# EAGLE board EASYDuino1-1-Rev1 (EAGLE 5.10)
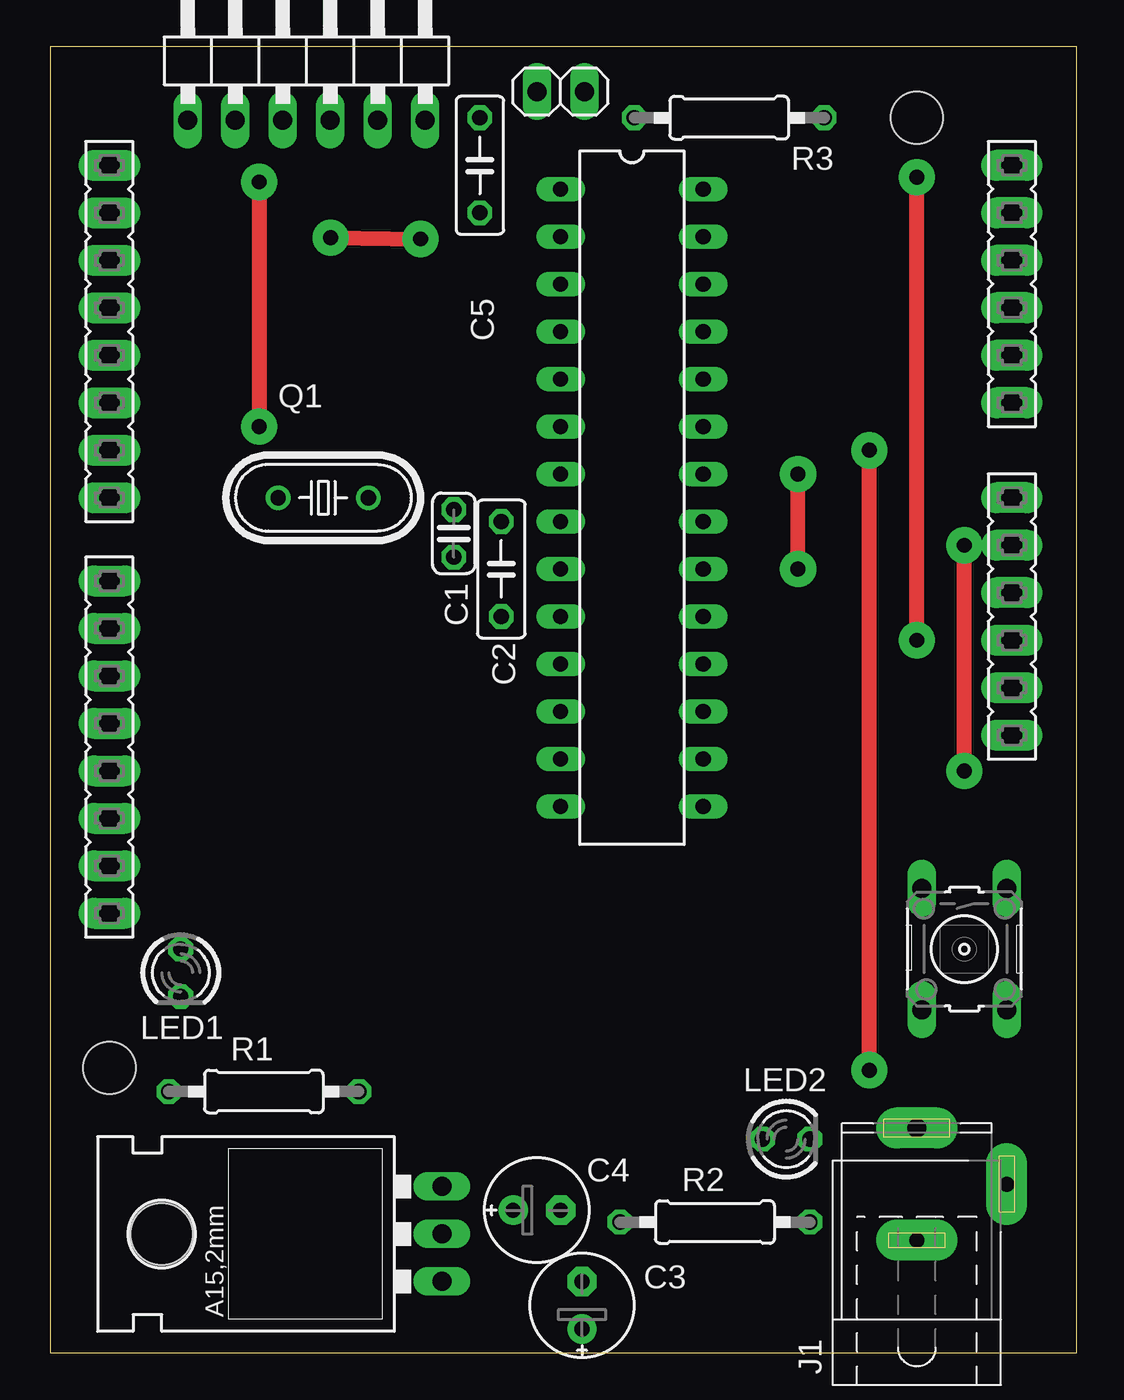
[diagram p0: board, top side]
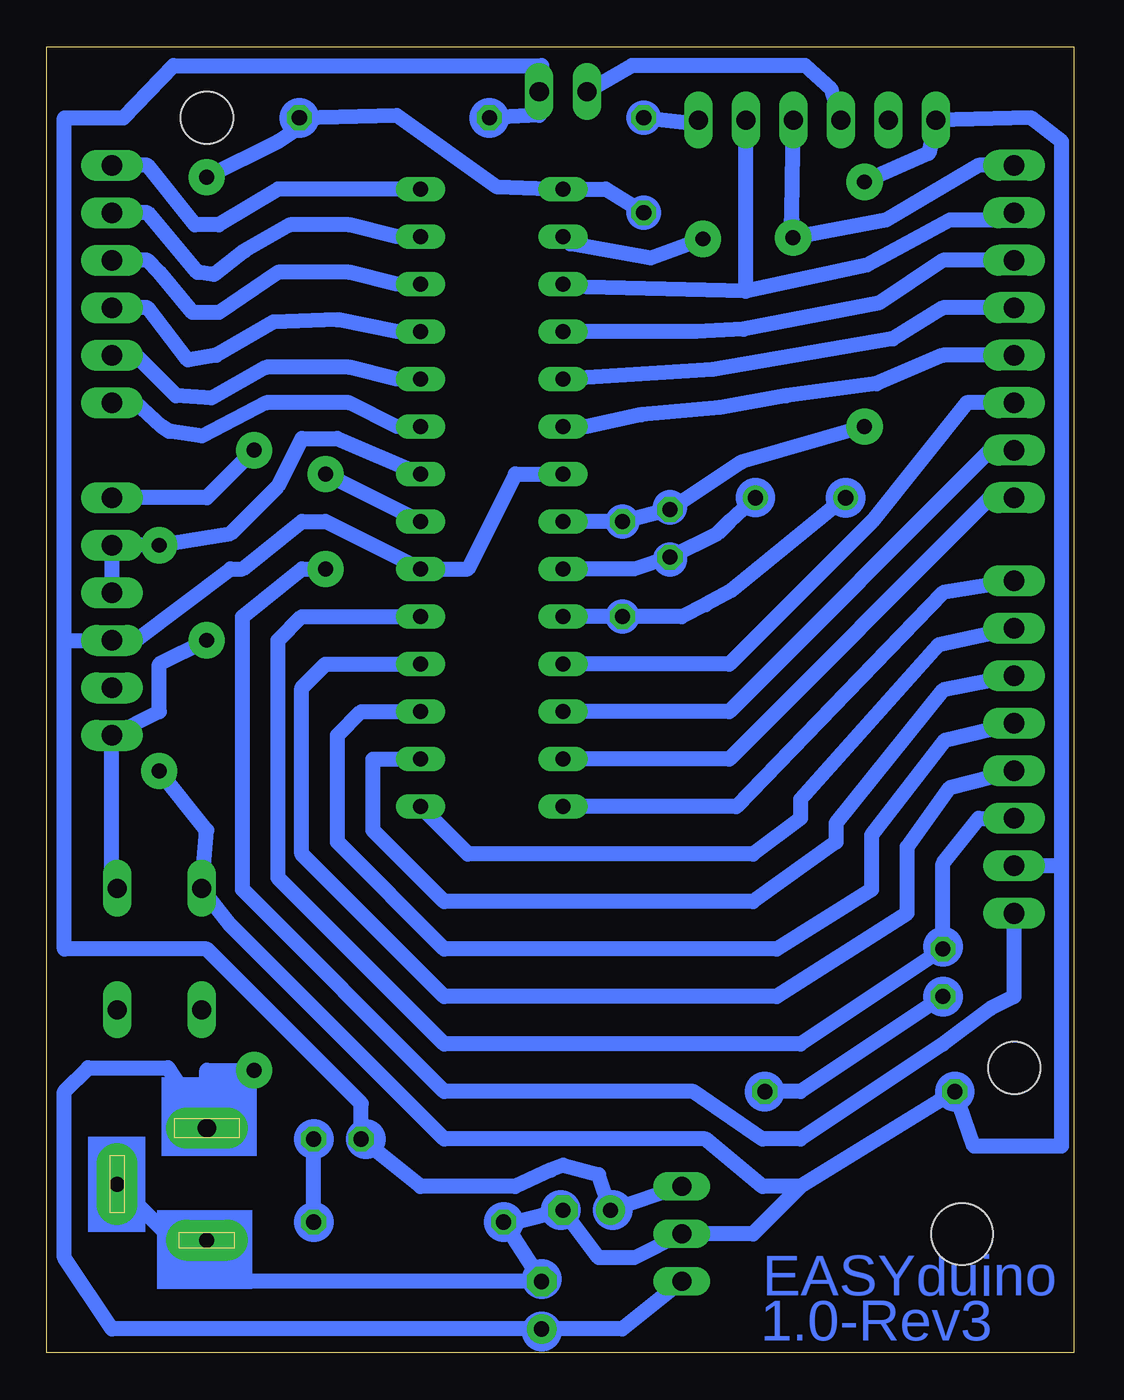
[diagram p1: board, bottom side, seen from below]

Size 54.91 x 69.84 mm. Coordinates in mm from the lower left corner, seen from the top.
Outline: 0,0 54.91,0 54.91,69.84 0,69.84 0,0
Copper layers (1*16): Top 0.035mm / dielectric 1.5mm / Bottom 0.035mm
Design rules "default": minimum track width 10mil, minimum drill 24mil, track to track 8mil, track to pad 8mil, pad to pad 8mil, via to via 8mil, smd to smd 8mil, copper to edge 40mil, drill to drill 8mil, minimum pad ring 10mil, minimum via ring 8mil, stop-mask expansion 4mil, vias tented up to drill 0mil, thermal gap 10mil
Holes 2.8 mm at 46.35,66.04 3.17,15.24

## Footprints (pad centres in the part's own frame; a part is rotated, then mirrored left to right if it is on the bottom)
C025-024X044 = drill 0.813 octagon: 1 -1.27,0; 2 1.27,0
C050-025X075 = drill 0.813 octagon: 1 -2.54,0; 2 2.54,0
E2,5-6E = drill 0.813 pad 1.575 round: + -1.27,0 | drill 0.813 pad 1.575 octagon: - 1.27,0
DIL28-3 = drill 0.813 long: 1 -16.51,-3.81; 2 -13.97,-3.81; 3 -11.43,-3.81; 4 -8.89,-3.81; 5 -6.35,-3.81; 6 -3.81,-3.81; 7 -1.27,-3.81; 8 1.27,-3.81; 9 3.81,-3.81; 10 6.35,-3.81; 11 8.89,-3.81; 12 11.43,-3.81; 13 13.97,-3.81; 14 16.51,-3.81; 15 16.51,3.81; 16 13.97,3.81; 17 11.43,3.81; 18 8.89,3.81; 19 6.35,3.81; 20 3.81,3.81; 21 1.27,3.81; 22 -1.27,3.81; 23 -3.81,3.81; 24 -6.35,3.81; 25 -8.89,3.81; 26 -11.43,3.81; 27 -13.97,3.81; 28 -16.51,3.81
78XXL = drill 1.016 long: GND 0,-3.81; IN -2.54,-3.81; OUT 2.54,-3.81 | hole 3.302: 0,11.176
SPC4077 = drill 0.8 pad 2.184 long: 1 -3,0; 2 0,-4.8 | drill 1 pad 2.184 long: 3 3,0
1X06/90 = drill 1.016 long: 1 -6.35,-3.81; 2 -3.81,-3.81; 3 -1.27,-3.81; 4 1.27,-3.81; 5 3.81,-3.81; 6 6.35,-3.81
1X02 = drill 1.016 long: 1 -1.27,0; 2 1.27,0
LED3MM = drill 0.813 octagon: A -1.27,0; K 1.27,0
HC49U-V = drill 0.813 round: 1 -2.413,0; 2 2.413,0
0207/10 = drill 0.813 octagon: 1 -5.08,0; 2 5.08,0
B3F-10XX = drill 1.016 long: 1 -3.251,2.261; 2 3.251,2.261; 3 -3.251,-2.261; 4 3.251,-2.261
FE08 = drill 1.1 long: 1 -8.89,0; 2 -6.35,0; 3 -3.81,0; 4 -1.27,0; 5 1.27,0; 6 3.81,0; 7 6.35,0; 8 8.89,0
FE06-MARCO = drill 1.1 long: 1 -6.35,0; 2 -3.81,0; 3 -1.27,0; 4 1.27,0; 5 3.81,0; 6 6.35,0

## Placement (x,y rotation side)
C1  22p  [C025-024X044]  21.59,43.81 270 top
C2  22p  [C050-025X075]  24.13,41.91 270 top
C3  100uF  [E2,5-6E]  28.45,2.54 90 top
C4  100uF  [E2,5-6E]  26.04,7.62 0 top
C5  10nF  [C050-025X075]  22.99,63.5 270 top
IC1  ATMEGA168/328  [DIL28-3]  31.11,45.72 270 top
IC2  7805  [78XXL]  17.14,6.35 90 top
J1  [SPC4077]  46.35,9.02 90 top
JP1  FTDI-cable  [1X06/90]  13.72,69.72 0 top
JP2  FTDI Vcc  [1X02]  27.3,67.44 180 top
LED1  [LED3MM]  6.99,20.32 270 top
LED2  [LED3MM]  39.37,11.43 0 top
Q1  16Mhz  [HC49U-V]  14.61,45.72 0 top
R1  560  [0207/10]  11.43,13.97 180 top
R2  560  [0207/10]  35.56,6.99 180 top
R3  10K  [0207/10]  36.32,66.04 180 top
S2  RESET  [B3F-10XX]  48.9,21.59 270 top
SV1  [FE08]  3.17,54.61 270 top
SV2  [FE08]  3.17,32.38 270 top
SV3  [FE06-MARCO]  51.44,57.15 90 top
SV4  [FE06-MARCO]  51.44,39.37 90 top

## Library data of the parts
C1-C4 = rcl
C5 R1-R3 = resistor
IC1 = atmel
IC2 = SparkFun
J1 = con-jack
JP1 JP2 = pinhead
LED1 LED2 = led
Q1 = crystal
S2 = switch-omron
SV1-SV4 = con-lsta-Marco

## Nets
+5V: C4.+ IC1.7 IC1.20 IC2.OUT JP2.1 LED2.A R3.2 SV4.3
C-RESET: C5.1 JP1.6
GND: C1.1 C2.1 C3.- C4.- IC1.8 IC1.22 IC2.GND J1.1 J1.2 JP1.1 R1.2 R2.2 S2.3 SV2.7 SV4.4 SV4.5
N$2: IC1.4 SV1.3
N$3: IC1.6 SV1.5
N$4: IC1.5 SV1.4
N$5: IC1.3 JP1.5 SV1.2
N$6: IC1.2 JP1.4 SV1.1
N$7: IC1.19 LED1.A SV2.6
N$8: IC1.18 SV2.5
N$9: C1.2 IC1.9 Q1.2
N$10: C2.2 IC1.10 Q1.1
N$11: IC1.17 SV2.4
N$12: IC1.14 SV2.1
N$13: IC1.13 SV1.8
N$14: IC1.12 SV1.7
N$15: IC1.11 SV1.6
N$16: IC1.16 SV2.3
N$17: IC1.15 SV2.2
N$19: IC1.21 SV2.8
N$20: IC1.23 SV3.1
N$21: LED1.K R1.1
N$23: LED2.K R2.1
N$25: C5.2 IC1.1 R3.1 S2.1 SV4.1
N$26: IC1.24 SV3.2
N$27: IC1.25 SV3.3
N$28: IC1.26 SV3.4
N$29: IC1.27 SV3.5
N$30: IC1.28 SV3.6
N$34: JP1.3 JP2.2
VIN: C3.+ IC2.IN J1.3 SV4.6

## Tracks (layer width: path | path; a pad name or v marks a point on that pad's centre or on a via)
+5V
  Bottom 0.813: IC2.OUT C4.+ 25.4,9.53 27.3,10.03 27.94,9.78 29.84,8.89 34.92,8.89 LED2.A 38.1,13.34 46.35,21.59 53.98,21.59 53.98,38.1 | 53.98,38.1 53.98,66.04 50.8,66.04 48.13,68.83 28.45,68.83 JP2.1 28.57,66.17 R3.2 | 53.98,38.1 SV4.3 50.16,38.1 45.09,41.91 44.45,41.91 41.27,44.45 40.01,44.45 IC1.20 32.38,41.91 29.84,46.99 IC1.7
C-RESET
  Bottom 0.813: C5.1 20.57,65.79 JP1.6
GND  (via drill 0.8 pad 1.93)
  Top 0.813: v48.9,31.11 v48.9,43.18 | v11.18,62.61 v11.18,49.53
  Bottom 0.813: 0.64,26.04 SV2.7 | 0.64,26.04 0.64,11.05 5.33,11.05 R1.2 14.61,8.89 | 14.61,8.89 17.14,6.35 IC2.GND 23.5,5.08 25.4,5.08 C4.- 29.84,6.99 R2.2 C3.- 46.35,3.81 J1.1 48.16,6.02 J1.2 | 0.64,26.04 0.64,64.77 2.29,66.04 JP1.1 7.75,64.14 v11.18,62.61 | IC1.22 39.37,48.9 41.27,48.9 42.55,46.35 45.09,43.81 v48.9,43.18 SV4.5 SV4.4 | 14.61,8.89 16.64,8.89 19.68,11.43 33.66,11.43 45.09,22.86 S2.3 46.35,27.94 v48.9,31.11 | IC1.8 C2.1 C1.1 17.78,47.62 v11.18,49.53
N$2
  Bottom 0.813: IC1.4 20.19,54.61 17.65,54.74 10.41,56.13 6.99,58.42 SV1.3
N$3
  Bottom 0.813: IC1.6 26.04,49.53 23.11,50.16 18.92,50.55 15.37,51.18 10.54,51.82 6.99,53.34 SV1.5
N$4
  Bottom 0.813: IC1.5 19.3,52.58 9.65,54.23 6.99,55.88 SV1.4
N$5
  Bottom 0.813: IC1.3 27.18,57.02 17.53,56.77 | 17.53,56.77 JP1.5 | SV1.2 3.56,60.58 6.6,60.58 11.05,58.17 17.53,56.77
N$6  (via drill 0.8 pad 1.93)
  Top 0.813: v15,59.62 v19.81,59.56
  Bottom 0.813: IC1.2 26.92,59.31 22.61,58.55 v19.81,59.56 | SV1.1 5.08,63.5 10.03,60.58 v15,59.62 | v15,59.62 15.11,59.69 15.08,60.97 | 15.08,60.97 JP1.4 | v15,59.62 15.08,60.97
N$7
  Bottom 0.813: SV2.6 5.08,28.57 6.99,26.16 LED1.A 14.61,16.51 33.66,16.51 42.55,25.4 42.55,38.1 41.27,39.37 IC1.19
N$8
  Bottom 0.813: IC1.18 40.01,36.83 41.27,35.56 41.27,26.67 33.66,19.05 15.88,19.05 8.89,23.5 8.89,27.05 6.6,30.23 SV2.5
N$9
  Bottom 0.813: Q1.2 18.41,44.45 19.05,43.81 C1.2 23.5,41.91 IC1.9
N$10
  Bottom 0.813: Q1.1 18.29,40.77 19.68,40.01 20.95,39.37 C2.2 IC1.10
N$11
  Bottom 0.813: IC1.17 38.1,34.29 39.37,33.02 39.37,27.3 33.66,21.59 15.88,21.59 10.79,24.77 10.79,27.69 6.86,32.77 SV2.4
N$12
  Bottom 0.813: SV2.1 6.99,40.64 18.03,29.21 IC1.14
N$13
  Bottom 0.813: SV1.8 4.45,45.72 18.41,31.75 IC1.13
N$14
  Bottom 0.813: IC1.12 18.41,34.29 4.45,48.26 SV1.7
N$15
  Bottom 0.813: IC1.11 18.41,36.83 10.79,44.45 5.71,50.8 SV1.6
N$16
  Bottom 0.813: SV2.3 6.99,35.43 12.7,28.32 12.7,27.3 17.14,24.13 33.66,24.13 37.47,27.94 37.47,31.75 IC1.16
N$17
  Bottom 0.813: IC1.15 32.38,26.67 17.14,26.67 14.61,28.57 14.61,29.59 7.24,37.85 SV2.2
N$19  (via drill 0.8 pad 1.93)
  Top 0.813: v40.01,41.91 v40.01,46.99
  Bottom 0.813: SV2.8 3.17,19.05 4.45,18.41 6.99,16.51 14.61,11.43 16.64,11.43 20.32,13.97 33.66,13.97 44.45,24.77 44.45,39.37 41.27,41.91 v40.01,41.91 | v40.01,46.99 IC1.21
N$20
  Bottom 0.813: IC1.23 36.2,49.53 38.73,50.8 43.18,50.8 46.61,49.02 48.39,49.28 48.77,49.53 50.16,50.8 SV3.1
N$21
  Bottom 0.813: LED1.K 14.61,13.97 R1.1
N$23
  Bottom 0.813: R2.1 LED2.K
N$25  (via drill 0.8 pad 1.93)
  Top 0.813: v46.35,38.1 v46.35,62.87
  Bottom 0.813: v46.35,38.1 48.9,36.83 48.9,34.29 SV4.1 51.44,25.12 S2.1 | v46.35,62.87 42.55,64.77 40.64,66.04 R3.1 36.2,66.17 30.86,62.36 IC1.1 25.02,62.23 C5.2
N$26
  Bottom 0.813: IC1.24 36.2,52.07 38.73,52.7 43.18,52.7 46.1,51.05 48.01,51.18 50.16,53.34 SV3.2
N$27
  Bottom 0.813: IC1.25 36.2,54.61 39.37,55.24 42.8,55.12 45.85,53.34 47.37,53.09 49.53,55.88 SV3.3
N$28
  Bottom 0.813: IC1.26 36.2,57.15 38.73,57.78 42.55,57.78 45.72,55.63 47.12,55.63 48.9,57.78 49.53,58.42 SV3.4
N$29
  Bottom 0.813: SV3.5 49.53,60.96 46.86,57.78 45.97,57.66 44.32,58.93 41.91,60.33 38.73,60.33 36.2,59.69 IC1.27
N$30
  Bottom 0.813: IC1.28 42.55,62.23 45.72,60.33 46.99,60.33 49.53,63.5 SV3.6
N$34
  Bottom 0.813: JP2.2 23.62,68.83 14.35,68.83 12.95,67.56 JP1.3
VIN  (via drill 0.8 pad 1.93)
  Top 0.813: v43.81,15.11 v43.81,48.26
  Bottom 0.813: IC2.IN 24.13,1.27 C3.+ 51.44,1.27 53.98,5.08 53.98,13.97 52.7,15.24 48.44,15.24 J1.3 | J1.3 46.35,13.97 | SV4.6 46.35,45.72 v43.81,48.26 | v43.81,15.11 46.35,15.11 J1.3
(copper drawn outside any net)
  shapes: Bottom area x5, Bottom circle x22

## Text on the board
Bottom: EASYduino | 1.0-Rev3
tTest: GND | 0 RX | 5 | RX | TX | RST | Vcc* | 1 | TX | 4 | 2 | 3 | 3 | PWM | 2 | 4 | ANALOG | 1 | 5 | PWM | 0 | 6 | PWM | 7 | Vin | DIGITAL | GND | 8 | GND | 9 PWM | 5V | 10 PWM | POWER | 3V3 | 11 PWM | RST | 12 | 13 | http://www.ritrivi.1free.ws | GND | EASYDuino1.1 | AREF | Rev1 | by Ritrivi Marco | lic. CC BY-SA 3.0
Muster: USB | ISP | PWR